# Altium PCB cs301_11.PcbDoc
Units mm, origin at the board's own origin, x right, y up, seen from the top; angles counter-clockwise.
Board outline 274.95 x 168.53 mm, 2 copper layers (Top Layer, Bottom Layer); 112 components, 68 nets, 384 pads, 0 vias.
Unrouted connection lines stored in the file: 31.
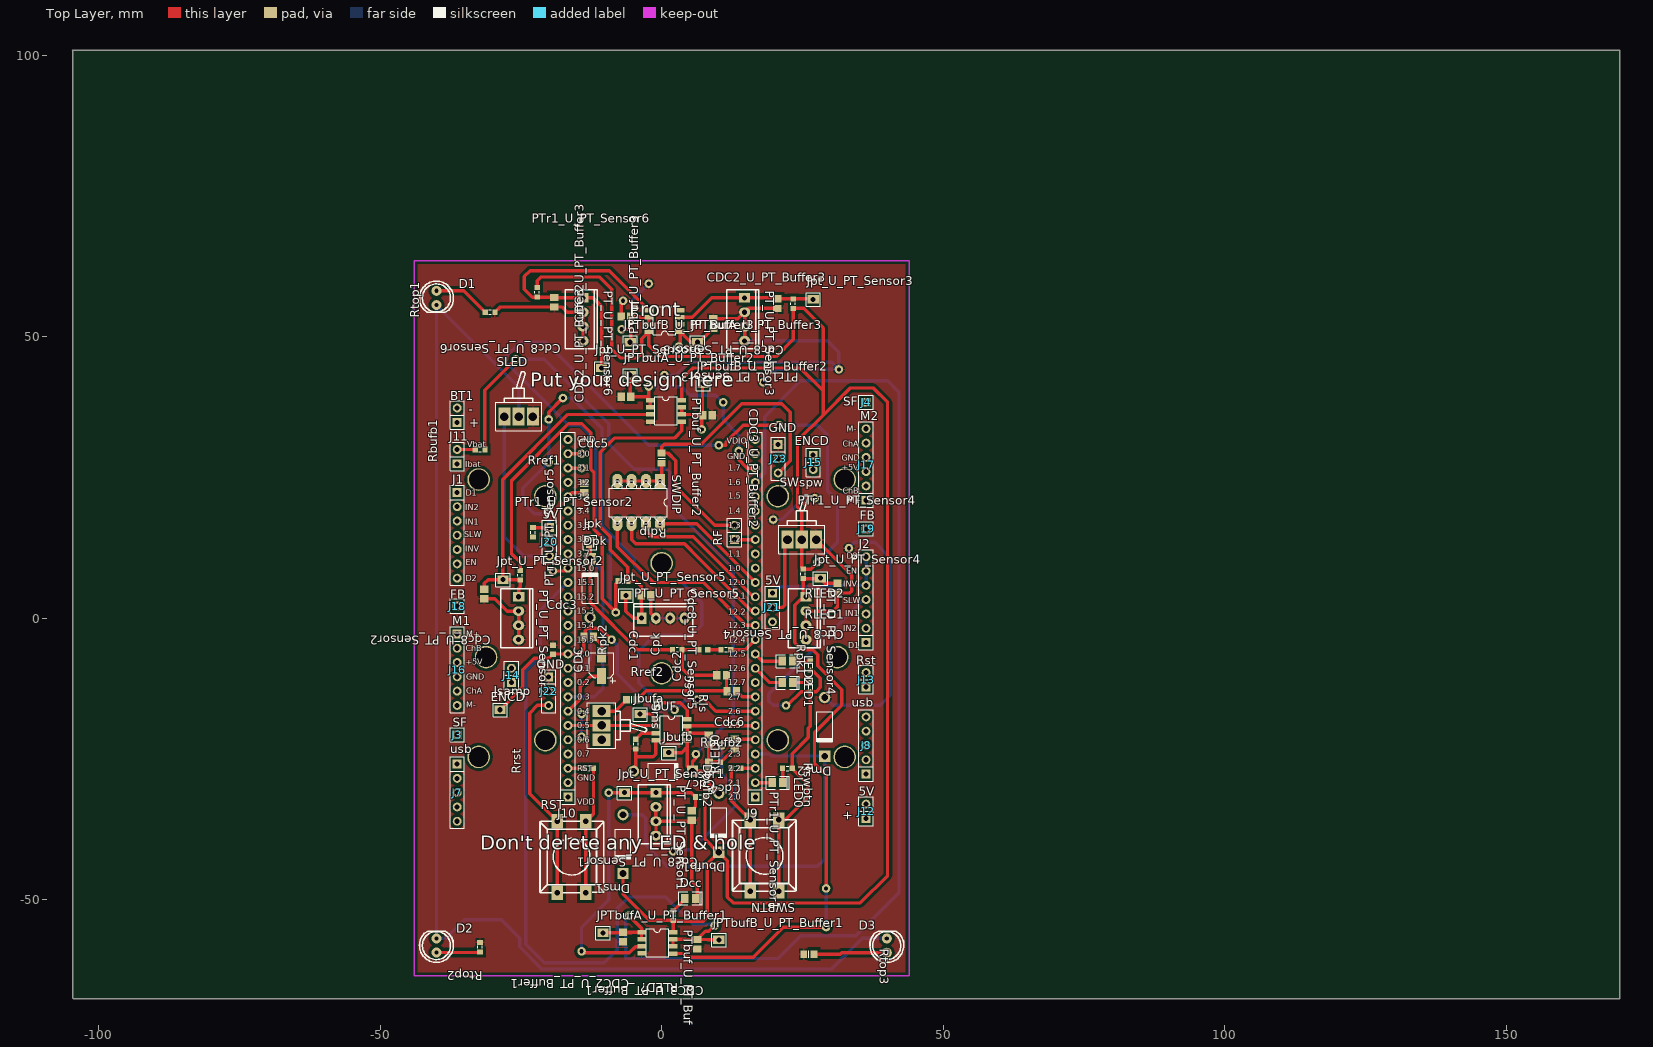
[diagram p0: Top Layer view]
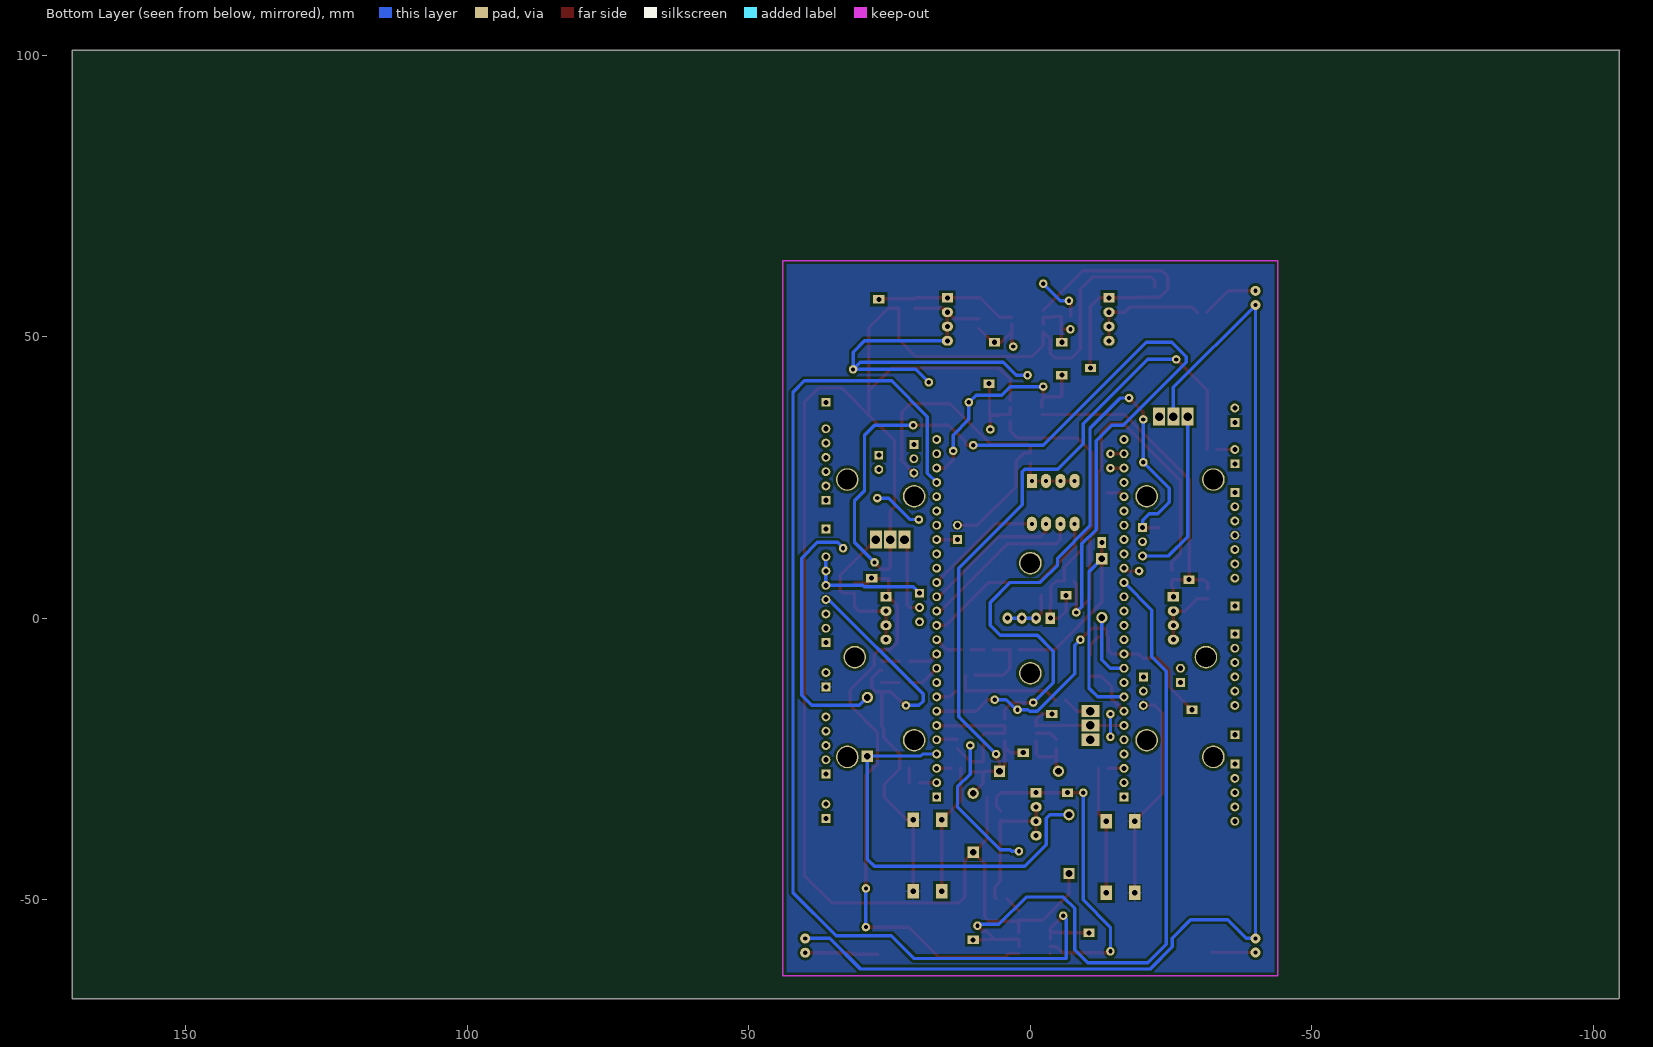
[diagram p1: Bottom Layer view, seen from below]

## Layer stack, top to bottom
Top Solder: solder mask 0.0102, Solder Resist, Dk 3.5
Top Layer: signal copper 0.0356
Dielectric1: dielectric 0.32, FR-4, Dk 4.8
Bottom Layer: signal copper 0.0356
Bottom Solder: solder mask 0.0102, Solder Resist, Dk 3.5

## Board outline
-104.6,-67.48 -104.473,-67.607 170.228,-67.607 170.228,100.922 -104.727,100.922 -104.6,100.795 -104.6,-67.48

## Design rules (kind name [scope] priority, off if disabled: settings)
Clearance [All] p1: gap=0.5
PolygonConnect [All] p1: connectstyle=Relief reliefconductorwidth=0.305 reliefentries=4 polygonreliefangle="90 Angle" airgapwidth=0.254
RoomDefinition U_Vref_2v5 [InComponentClass('U_Vref_2v5')] p1: confinementstyle=ConfineIn formatcopy=TRUE lockcomponents=FALSE outline 146.558,-19.304 186.182,-19.304 186.182,-4.064 146.558,-4.064
RoomDefinition U_Sensors [InComponentClass('U_Sensors')] p2: confinementstyle=ConfineIn formatcopy=TRUE lockcomponents=FALSE outline 1.016,129.54 199.136,129.54 199.136,145.796 1.016,145.796
RoomDefinition U_PT_Sensor6 [InComponentClass('U_PT_Sensor6')] p3: confinementstyle=ConfineIn formatcopy=TRUE lockcomponents=FALSE outline 173.482,157.988 246.888,157.988 246.888,176.53 173.482,176.53
RoomDefinition U_PT_Sensor5 [InComponentClass('U_PT_Sensor5')] p4: confinementstyle=ConfineIn formatcopy=TRUE lockcomponents=FALSE outline 172.212,89.916 354.838,89.916 354.838,108.458 172.212,108.458
RoomDefinition U_PT_Sensor4 [InComponentClass('U_PT_Sensor4')] p5: confinementstyle=ConfineIn formatcopy=TRUE lockcomponents=FALSE outline 169.672,73.406 351.996,73.406 351.996,91.948 169.672,91.948
RoomDefinition U_PT_Sensor3 [InComponentClass('U_PT_Sensor3')] p6: confinementstyle=ConfineIn formatcopy=TRUE lockcomponents=FALSE outline 171.958,56.642 354.584,56.642 354.584,75.184 171.958,75.184
RoomDefinition U_PT_Sensor2 [InComponentClass('U_PT_Sensor2')] p7: confinementstyle=ConfineIn formatcopy=TRUE lockcomponents=FALSE outline 169.672,39.878 352.298,39.878 352.298,58.42 169.672,58.42
RoomDefinition U_PT_Sensor1 [InComponentClass('U_PT_Sensor1')] p8: confinementstyle=ConfineIn formatcopy=TRUE lockcomponents=FALSE outline 171.498,21.928 350.568,21.928 350.568,40.47 171.498,40.47
RoomDefinition U_PT_Buffer3 [InComponentClass('U_PT_Buffer3')] p9: confinementstyle=ConfineIn formatcopy=TRUE lockcomponents=FALSE outline 171.498,12.276 313.992,12.276 313.992,23.198 171.498,23.198
RoomDefinition U_PT_Buffer2 [InComponentClass('U_PT_Buffer2')] p10: confinementstyle=ConfineIn formatcopy=TRUE lockcomponents=FALSE outline 171.498,2.624 313.992,2.624 313.992,13.546 171.498,13.546
RoomDefinition U_PT_Buffer1 [InComponentClass('U_PT_Buffer1')] p11: confinementstyle=ConfineIn formatcopy=TRUE lockcomponents=FALSE outline 171.498,-7.028 311.452,-7.028 311.452,3.894 171.498,3.894
RoomDefinition U_Interface [InComponentClass('U_Interface')] p12: confinementstyle=ConfineIn formatcopy=TRUE lockcomponents=FALSE outline 171.244,-53.51 279.702,-53.51 279.702,-35.222 171.244,-35.222
RoomDefinition cs301_11 [InComponentClass('cs301_11')] p13: confinementstyle=ConfineIn formatcopy=TRUE lockcomponents=FALSE outline 171.244,-67.988 205.534,-67.988 205.534,-52.24 171.244,-52.24
RoutingVias [All] p1: holewidth=0.7 width=1.7 viastyle="Through Hole" minholewidth=0.7 minwidth=1.6 maxholewidth=0.7 maxwidth=1.6
SilkToSolderMaskClearance SilkscreenOverComponentPads [IsPad] p1: minsilkscreentomaskgap=0.254 clearancetoexposedcopper=TRUE
SolderMaskExpansion [All] p1: expansion=0.102
UnpouredPolygon [All] p1: allowunpoured=FALSE
Width [All] p1: maxlimit=0.7 minlimit=0.3 preferedwidth=0.6 minimp=50.000000 maximp=50.000000 favimp=50.000000
28 further rules are at their usual default settings.

## Classes and differential pairs
channel class PT_Sensor: U_PT_Sensor1 U_PT_Sensor2 U_PT_Sensor3 U_PT_Sensor4 U_PT_Sensor5 U_PT_Sensor6
channel class PT_Buffer: U_PT_Buffer1 U_PT_Buffer2 U_PT_Buffer3
net class SOB[1..3]: SOB1 SOB2 SOB3
net class SOA[1..3]: SOA1 SOA2 SOA3
net class PTS[1..6]: PTS1 PTS2 PTS3 PTS4 PTS5 PTS6
component class U_Vref_2v5: BUF CDC Jbufa Rref1 Rref2
component class U_Sensors: Cdc1 Cdc2 Cdc3 Cdc4 Cdc5 Cdc6 Cdc7 Cpk Csc Dbufb1 Dbufb2 Dcc Dms1 Dms2 Dpk Jbufb Jpk Jsamp Rbufb1 Rbufb2 RLED? Rls Rpk1 Rpk2 Sms SWspw
component class U_PT_Sensor6: Cdc8_U_PT_Sensor6 Jpt_U_PT_Sensor6 PT_U_PT_Sensor6 PTr1_U_PT_Sensor6
component class U_PT_Sensor5: Cdc8_U_PT_Sensor5 Jpt_U_PT_Sensor5 PT_U_PT_Sensor5 PTr1_U_PT_Sensor5
component class U_PT_Sensor4: Cdc8_U_PT_Sensor4 Jpt_U_PT_Sensor4 PT_U_PT_Sensor4 PTr1_U_PT_Sensor4
component class U_PT_Sensor3: Cdc8_U_PT_Sensor3 Jpt_U_PT_Sensor3 PT_U_PT_Sensor3 PTr1_U_PT_Sensor3
component class U_PT_Sensor2: Cdc8_U_PT_Sensor2 Jpt_U_PT_Sensor2 PT_U_PT_Sensor2 PTr1_U_PT_Sensor2
component class U_PT_Sensor1: Cdc8_U_PT_Sensor1 Jpt_U_PT_Sensor1 PT_U_PT_Sensor1 PTr1_U_PT_Sensor1
component class U_PT_Buffer3: CDC2_U_PT_Buffer3 CDC3_U_PT_Buffer3 JPTbufA_U_PT_Buffer3 JPTbufB_U_PT_Buffer3 PTbuf_U_PT_Buffer3
component class U_PT_Buffer2: CDC2_U_PT_Buffer2 CDC3_U_PT_Buffer2 JPTbufA_U_PT_Buffer2 JPTbufB_U_PT_Buffer2 PTbuf_U_PT_Buffer2
component class U_PT_Buffer1: CDC2_U_PT_Buffer1 CDC3_U_PT_Buffer1 JPTbufA_U_PT_Buffer1 JPTbufB_U_PT_Buffer1 PTbuf_U_PT_Buffer1
component class U_Interface: LED0 LED1 LED2 Rdip RLED0 RLED1 RLED2 Rrst RST Rswbtn SWBTN SWDIP

## Components (designator, comment, footprint, x,y, rotation, side; value= is the part's Value field where it differs from the comment)
BT1 "Battery" SIP2 -36.322,34.798 r90 top locked
BUF "LT6221" ECE-SO8 1.778,-19.812 r0 top
CDC "10uF" ECE-CAPAE4X5.4SM -10.668,-8.382 r90 top
Cdc1 "47nF" ECE-CAPC2012-0805SM -12.954,-3.302 r0 top
Cdc2 "47nF" ECE-CAPC2012-0805SM 10.668,-10.16 r180 top
CDC2_U_PT_Buffer1 "47nF" ECE-CAPC2012-0805SM -6.858,-56.642 r270 top (schematic designator Cdc2)
CDC2_U_PT_Buffer2 "47nF" ECE-CAPC2012-0805SM -6.35,39.37 r180 top (schematic designator Cdc2)
CDC2_U_PT_Buffer3 "47nF" ECE-CAPC2012-0805SM 9.144,52.324 r90 top (schematic designator Cdc2)
Cdc3 "47nF" ECE-CAPC1608-0603SM -19.304,-5.588 r90 top
CDC3_U_PT_Buffer1 "47nF" ECE-CAPC2012-0805SM 6.35,-57.912 r270 top (schematic designator Cdc3)
CDC3_U_PT_Buffer2 "47nF" ECE-CAPC2012-0805SM 8.128,36.068 r0 top (schematic designator Cdc3)
CDC3_U_PT_Buffer3 "47nF" ECE-CAPC2012-0805SM -6.35,53.594 r180 top (schematic designator Cdc3)
Cdc4 "100nF" ECE-CAPC2012-0805SM 12.954,-22.352 r270 top
Cdc5 "100nF" ECE-CAPC2012-0805SM -13.716,23.114 r90 top
Cdc6 "100nF" ECE-CAPC1608-0603SM 10.414,-26.416 r90 top
Cdc7 "100nF" ECE-CAPC2012-0805SM 8.382,-21.59 r270 top
Cdc8_U_PT_Sensor1 "47nF" ECE-CAPC2012-0805SM 5.334,-35.052 r270 top (schematic designator Cdc8)
Cdc8_U_PT_Sensor2 "47nF" ECE-CAPC2012-0805SM -31.496,4.318 r270 top (schematic designator Cdc8)
Cdc8_U_PT_Sensor3 "47nF" ECE-CAPC2012-0805SM 20.574,55.88 r270 top (schematic designator Cdc8)
Cdc8_U_PT_Sensor4 "47nF" ECE-CAPC2012-0805SM 31.242,5.334 r270 top (schematic designator Cdc8)
Cdc8_U_PT_Sensor5 "47nF" ECE-CAPC2012-0805SM -2.794,4.064 r0 top (schematic designator Cdc8)
Cdc8_U_PT_Sensor6 "47nF" ECE-CAPC2012-0805SM -19.05,56.134 r270 top (schematic designator Cdc8)
Cpk "1uF" ECE-CAPC1608-0603SM 7.366,-5.588 r180 top
Csc "1uF" ECE-CAPC2012-0805SM 12.446,-12.954 r180 top
D1 "LED" LED0.1/5MM#1 -40,55.62 r180 top locked
D2 "LED" LED0.1/5MM#2 -40,-56.88 r0 top locked
D3 "LED" LED0.1/5MM#1 40,-56.88 r0 top locked
Dbufb1 "1N4148" ECE-DIO10.46-5.3x2.8TH 10.16,-36.322 r270 top
Dbufb2 "1N4148" ECE-DIO10.46-5.3x2.8TH 0.254,-27.178 r0 top
Dcc "LTST-C170KAKT" ECE-LED2012-0805SM 5.08,-49.784 r0 top
Dms1 "1N4148" ECE-DIO10.46-5.3x2.8TH -6.858,-40.132 r270 top
Dms2 "1N4148" ECE-DIO10.46-5.3x2.8TH 28.956,-19.304 r270 top
Dpk "1N4148" ECE-DIO10.46-5.3x2.8TH -12.7,5.334 r90 top
J1 "CON7" SIP7 -36.322,22.352 r270 top locked
J2 "CON7" SIP7 36.322,-4.318 r90 top locked
J3 "SF" SIP1/0.6 -36.322,-20.701 r270 top locked
J4 "SF" SIP1/0.6 36.322,38.354 r180 top locked
J7 "usb" SIP5 -36.322,-25.908 r270 top locked
J8 "usb" SIP5 36.322,-27.686 r90 top locked
J9 "26PIN" SIP26 16.637,-31.75 r90 top locked
J10 "26PIN" SIP26 -16.637,-31.75 r90 top locked
J11 "Battery" sip2 -36.322,27.432 r90 top locked
J12 "5V" sip2 36.322,-35.56 r90 top locked
J13 "Rst" sip2 36.322,-12.192 r90 top locked
J14 "ENCD" sip2 -26.67,-11.43 r90 top locked
J15 "ENCD" sip2 26.924,28.956 r270 top locked
J16 "M1" sip6 -36.322,-2.794 r270 top locked
J17 "M2" sip6 36.322,20.955 r90 top locked
J18 "FB" SIP1/0.6 -36.322,2.159 r0 top locked
J19 "FB" SIP1/0.6 36.322,15.875 r0 top locked
J20 "5V" sip3 -19.939,16.129 r270 top locked
J21 "5V" sip3 19.685,4.445 r270 top locked
J22 "GND" sip3 -20.066,-10.414 r270 top locked
J23 "GND" sip3 20.701,30.861 r270 top locked
Jbufa "TEST PIN" ECE-HDR1TH -3.81,-17.018 r90 top
Jbufb "TEST PIN" ECE-HDR1TH 1.27,-23.876 r90 top
Jpk "TEST PIN" ECE-HDR1TH -12.7,13.462 r0 top
Jpt_U_PT_Sensor1 "TEST PIN" ECE-HDR1TH -6.604,-30.988 r90 top (schematic designator Jpt)
Jpt_U_PT_Sensor2 "TEST PIN" ECE-HDR1TH -28.194,6.858 r90 top (schematic designator Jpt)
Jpt_U_PT_Sensor3 "TEST PIN" ECE-HDR1TH 26.924,56.642 r90 top (schematic designator Jpt)
Jpt_U_PT_Sensor4 "TEST PIN" ECE-HDR1TH 28.194,7.112 r90 top (schematic designator Jpt)
Jpt_U_PT_Sensor5 "TEST PIN" ECE-HDR1TH -6.35,4.064 r90 top (schematic designator Jpt)
Jpt_U_PT_Sensor6 "TEST PIN" ECE-HDR1TH -10.668,44.45 r90 top (schematic designator Jpt)
JPTbufA_U_PT_Buffer1 "TEST PIN" ECE-HDR1TH -10.414,-55.88 r90 top (schematic designator JPTbufA)
JPTbufA_U_PT_Buffer2 "TEST PIN" ECE-HDR1TH -5.588,43.18 r90 top (schematic designator JPTbufA)
JPTbufA_U_PT_Buffer3 "TEST PIN" ECE-HDR1TH 6.35,49.022 r90 top (schematic designator JPTbufA)
JPTbufB_U_PT_Buffer1 "TEST PIN" ECE-HDR1TH 10.16,-57.15 r90 top (schematic designator JPTbufB)
JPTbufB_U_PT_Buffer2 "TEST PIN" ECE-HDR1TH 7.366,41.656 r90 top (schematic designator JPTbufB)
JPTbufB_U_PT_Buffer3 "TEST PIN" ECE-HDR1TH -5.588,49.022 r90 top (schematic designator JPTbufB)
Jsamp "TEST PIN" ECE-HDR1TH -28.702,-16.256 r90 top
LED0 "LTST-C170KGKT" ECE-LED2012-0805SM 20.574,-29.21 r0 top
LED1 "LTST-C170KAKT" ECE-LED2012-0805SM 22.352,-11.43 r0 top
LED2 "LTST-C170KAKT" ECE-LED2012-0805SM 22.352,-7.62 r0 top
PT_U_PT_Sensor1 "4 Way" ECE-600104STTH -1.016,-30.988 r0 top (schematic designator PT)
PT_U_PT_Sensor2 "4 Way" ECE-600104STTH -25.4,3.81 r0 top (schematic designator PT)
PT_U_PT_Sensor3 "4 Way" ECE-600104STTH 14.732,56.896 r0 top (schematic designator PT)
PT_U_PT_Sensor4 "4 Way" ECE-600104STTH 25.654,3.81 r0 top (schematic designator PT)
PT_U_PT_Sensor5 "4 Way" ECE-600104STTH -3.556,0 r90 top (schematic designator PT)
PT_U_PT_Sensor6 "4 Way" ECE-600104STTH -13.97,56.896 r0 top (schematic designator PT)
PTbuf_U_PT_Buffer1 "LT6221" ECE-SO8 -0.762,-57.658 r0 top (schematic designator PTbuf)
PTbuf_U_PT_Buffer2 "LT6221" ECE-SO8 0.762,36.83 r0 top (schematic designator PTbuf)
PTbuf_U_PT_Buffer3 "LT6221" ECE-SO8 0.508,52.832 r180 top (schematic designator PTbuf)
PTr1_U_PT_Sensor1 "39K" ECE-RESC1608-0603SM 6.858,-31.75 r0 top (schematic designator PTr1)
PTr1_U_PT_Sensor2 "39K" ECE-RESC1608-0603SM -25.146,7.62 r90 top (schematic designator PTr1)
PTr1_U_PT_Sensor3 "39K" ECE-RESC1608-0603SM 23.368,55.88 r270 top (schematic designator PTr1)
PTr1_U_PT_Sensor4 "39K" ECE-RESC1608-0603SM 25.146,7.874 r90 top (schematic designator PTr1)
PTr1_U_PT_Sensor5 "39K" ECE-RESC1608-0603SM -6.858,6.604 r180 top (schematic designator PTr1)
PTr1_U_PT_Sensor6 "39K" ECE-RESC1608-0603SM -22.098,57.912 r90 top (schematic designator PTr1)
Rbufb1 "47K" ECE-RESC1608-0603SM -32.258,29.972 r180 top
Rbufb2 "56K" ECE-RESC2012-0805SM 8.382,-26.416 r270 top
Rdip "1K" ECE-RESC2012-0805SM 0,28.448 r270 top
RF "" sip2 12.954,13.97 r90 top
RLED0 "270R" ECE-RESC1608-0603SM 22.352,-26.67 r180 top
RLED1 "270R" ECE-RESC1608-0603SM 26.416,-12.192 r90 top
RLED2 "270R" ECE-RESC1608-0603SM 26.416,-8.382 r90 top
RLED? "270R" ECE-RESC1608-0603SM 2.032,-52.832 r270 top
Rls "4K7" ECE-RESC2012-0805SM -5.334,-14.478 r0 top
Rpk1 "220R" ECE-RESC1608-0603SM 11.43,-5.588 r0 top
Rpk2 "220K" ECE-RESC1608-0603SM 2.794,-5.588 r180 top
Rref1 "47K" ECE-RESC1608-0603SM -22.86,15.24 r90 top
Rref2 "47K" ECE-RESC1608-0603SM -4.572,-22.352 r90 top
Rrst "1K" ECE-RESC1608-0603SM -12.954,-26.67 r180 top
RST "SW-PB" SW-PB -19.05,-46.228 r90 top
Rswbtn "1K" ECE-RESC1608-0603SM 13.208,-26.67 r0 top
Rtop1 "270R" ECE-RESC1608-0603SM -30.48,54.356 r180 top
Rtop2 "270R" ECE-RESC1608-0603SM -32.258,-58.42 r270 top
Rtop3 "270R" ECE-RESC2012-0805SM 26.162,-59.69 r0 top
SLED "SW-SPDT" SW-SPDT -27.94,35.814 r0 top
Sms "SW-SPDT" SW-SPDT -10.668,-16.51 r270 top
SWBTN "SW-PB" SW-PB 21.336,-38.354 r270 top
SWDIP "*" ECE-DIP8 -0.254,24.384 r270 top
SWspw "SW-SPDT" SW-SPDT 22.352,13.97 r0 top

## Footprints (in the part's own frame and the unit in brackets; to place one, negate y for a bottom-side part, rotate by r counter-clockwise, add the part's x,y. Pads: shape width x height; smd on the part's side, far side on the other; paste and mask are expansions set on the pad)
ECE-600104STTH [mm] "Polarised Header 4 way"
  rect 2x1.7 hole 0.9: 1(0,0)
  oval 2x1.7 hole 0.9: 2(0,-2.54) 3(0,-5.08) 4(0,-7.62)
  silkscreen extent -3.16,-9.04 2.54,1.42
ECE-CAPAE4X5.4SM [mm] "Capacitor, polarized, aluminum can; 4x5.4mm DxH"
  rect 2.8x1.6 smd: 1(-1.9,0) 2(1.9,0)
  silkscreen extent -3.2,-2.5 2.29,2.16
ECE-CAPC1608-0603SM [mm] "Chip Capacitor, Body 1.6x0.8mm, IPC Medium Density"
  rect 1x1 smd: 1(-0.8,0) 2(0.8,0)
  body extent -0.87,-0.48 0.87,0.48, height 0.85
ECE-CAPC2012-0805SM [mm] "Chip Capacitor, Body 2.0x1.3mm, IPC Medium Density"
  rect 1.3x1.5 smd: 1(-0.85,0) 2(0.85,0)
  body extent -1,-0.6 1,0.6, height 0.5
ECE-DIO10.46-5.3x2.8TH [mm] "Diode, Axial; Body 5.2 x 2.7 mm (LxDia. max), Lead Dia. 0.86 mm (max)"
  round 2 hole 1.2: 1(-5.23,0)
  rect 2x2 hole 1.2: 2(5.23,0)
  silkscreen extent -2.65,-1.4 2.75,1.4
ECE-DIP8 [mil]
  rect 100x70 hole 28: 1(0,0)
  oval 100x70 hole 28: 2(0,-100) 3(0,-200) 4(0,-300) 5(300,-300) 6(300,-200) 7(300,-100) 8(300,0)
  silkscreen extent 0,-357 300,50
ECE-HDR1TH [mm] "Test Pin"
  rect 1.5x2 hole 0.9: 1(0,0)
  silkscreen extent -1.25,-1.29 1.15,1.25
ECE-LED2012-0805SM [mm] "RED AS AlGaAs SMD LED, Body; 2mm x 1.25 mm (LxW)"
  rect 1.3x1.6 smd: 1(-0.95,0) 2(0.95,0)
  silkscreen extent -2,-1.15 2.13,1.15
ECE-RESC1608-0603SM [mm] "Chip Resistor, Body 1.6x0.8mm, IPC Medium Density"
  rect 0.9x1 smd: 1(-0.85,0) 2(0.85,0)
  silkscreen extent -0.2,-0.4 0.2,0.4, body extent -0.85,-0.48 0.85,0.48, height 0.6
ECE-RESC2012-0805SM [mm] "Chip Resistor, Body 2.0x1.3mm, IPC Medium Density"
  rect 1.2x1.4 smd: 1(-0.9,0) 2(0.9,0)
  silkscreen extent 0,-0.6 0,0.6, body extent -0.9,-0.62 1.1,0.62, height 0.4
ECE-SO8 [mm] "8-Lead Plastic Small Outline, 1.27mm pitch"
  rect 1.5x0.8 smd: 1(-2.8,1.905) 2(-2.8,0.635) 3(-2.8,-0.635) 4(-2.8,-1.9) 5(2.8,-1.905) 6(2.8,-0.635) 7(2.8,0.635) 8(2.8,1.905)
  silkscreen extent -2,-2.5 2,2.5, body extent -3,-2.45 3,2.45, height 1.7
LED0.1/5MM#1 [mil]
  round 70 hole 30: A(0,0) K(0,-100)
  silkscreen extent -118,-168 118,50
LED0.1/5MM#2 [mil]
  round 70 hole 30: A(0,0) K(0,-98.42)
  silkscreen extent -118,-168 118,50
SIP1/0.6 [mil]
  rect 62x62 hole 35.43: 1(0,0)
  silkscreen extent -50,-50 50,50
SIP2 [mil]
  rect 62x62 hole 35.43: 1(0,0)
  round 62 hole 35.43: 2(100,0)
  silkscreen extent -50,-50 150,50
sip2 [mil]
  rect 62x62 hole 35.43: 1(0,0)
  round 62 hole 35.43: 2(100,0)
  silkscreen extent -50,-50 150,50
sip3 [mil]
  rect 62x62 hole 35.43: 1(0,0)
  round 62 hole 35.43: 2(100,0) 3(200,0)
  silkscreen extent -50,-50 250,50
SIP5 [mil]
  rect 62x62 hole 35.43: 1(0,0)
  round 62 hole 35.43: 2(100,0) 3(200,0) 4(300,0) 5(400,0)
  silkscreen extent -50,-50 450,50
sip6 [mil]
  rect 62x62 hole 35.43: 1(0,0)
  round 62 hole 35.43: 2(100,0) 3(200,0) 4(300,0) 5(400,0) 6(500,0)
  silkscreen extent -50,-50 550,50
SIP7 [mil]
  rect 62x62 hole 35.43: 1(0,0)
  round 62 hole 35.43: 2(100,0) 3(200,0) 4(300,0) 5(400,0) 6(500,0) 7(600,0)
  silkscreen extent -50,-50 650,50
SIP26 [mil]
  rect 62x62 hole 35.43: 1(0,0)
  round 62 hole 35.43: 2(100,0) 3(200,0) 4(300,0) 5(400,0) 6(500,0) 7(600,0) 8(700,0) 9(800,0) 10(900,0) 11(1000,0) 12(1100,0) 13(1200,0) 14(1300,0) 15(1400,0) 16(1500,0) 17(1600,0) 18(1700,0) 19(1800,0) 20(1900,0) 21(2000,0) 22(2100,0) 23(2200,0) 24(2300,0) 25(2400,0) 26(2500,0)
  silkscreen extent -50,-50 2550,50
SW-PB [mil]
  rect 100x80 hole 40: 1(-100,-20) 1(400,-20) 2(-100,-220) 2(400,-220)
  silkscreen extent -100,-345 400,100
SW-SPDT [mil]
  rect 85x125 hole 60: 1(0,0) 2(100,0) 3(200,0)
  silkscreen extent -60,-100 260,315

## Part data
BT1 J11 J12 J13 J14 J15 RF: library part CON2, "Connector"
BUF PTbuf_U_PT_Buffer1 PTbuf_U_PT_Buffer2 PTbuf_U_PT_Buffer3: library part OPA000102, "IC OPAMP LT6221 DUAL SM"
CDC: library part CAP000303, "CAP 10uF 16V ELE SM"
Cdc1 Cdc2 CDC2_U_PT_Buffer1 CDC2_U_PT_Buffer2 CDC2_U_PT_Buffer3 CDC3_U_PT_Buffer1 CDC3_U_PT_Buffer2 CDC3_U_PT_Buffer3 Cdc8_U_PT_Sensor1 Cdc8_U_PT_Sensor2 Cdc8_U_PT_Sensor3 Cdc8_U_PT_Sensor4 Cdc8_U_PT_Sensor5 Cdc8_U_PT_Sensor6: library part CAP000522, "CAP CER 47nF 50V X7R SM0805"
Cdc3: library part CAP000622, "CAP CER 47nF 50V X7R SM0603"
Cdc4 Cdc5 Cdc7: library part CAP000524, "CAP CER 100nF 50V X7R SM0805"
Cdc6: library part CAP000624, "CAP CER 100nF 25V X7R SM0603"
Cpk: library part CAP000630, "CAP CER 1uF 50V X7R SM0603"
Csc: library part CAP000530, "CAP CER 1uF 50V X7R SM0805"
Dbufb1 Dbufb2 Dms1 Dms2 Dpk: library part DIO000005, "Small Signal Diode 2A 100V TH"
Dcc LED1 LED2: library part DIO000105, "LED RED ORANGE CLEAR 0805 SMD"
J1 J2: "Connector"
J3 J4 J18 J19: library part CON1, "Connector"
J7 J8: library part CON5, "Connector"
J16 J17: library part CON6, "Connector"
J20 J21 J22 J23: library part CON3, "Connector"
Jbufa Jbufb Jpk Jpt_U_PT_Sensor1 Jpt_U_PT_Sensor2 Jpt_U_PT_Sensor3 Jpt_U_PT_Sensor4 Jpt_U_PT_Sensor5 Jpt_U_PT_Sensor6 JPTbufA_U_PT_Buffer1 JPTbufA_U_PT_Buffer2 JPTbufA_U_PT_Buffer3 JPTbufB_U_PT_Buffer1 JPTbufB_U_PT_Buffer2 JPTbufB_U_PT_Buffer3 Jsamp: library part CON000017
LED0: library part DIO000104, "LED GREEN CLEAR 0805 SM"
PT_U_PT_Sensor1 PT_U_PT_Sensor2 PT_U_PT_Sensor3 PT_U_PT_Sensor4 PT_U_PT_Sensor5 PT_U_PT_Sensor6: library part CON000003, "HEADER POLARISED 4WAY TH"
PTr1_U_PT_Sensor1 PTr1_U_PT_Sensor2 PTr1_U_PT_Sensor3 PTr1_U_PT_Sensor4 PTr1_U_PT_Sensor5 PTr1_U_PT_Sensor6: library part RES000157, "RES CER 39K 1608 SM"
Rbufb1 Rref1 Rref2: library part RES000158, "RES CER 47K 1608 SM"
Rbufb2: library part RES000559, "RES CER 56K 2012 SM"
Rdip: library part RES000538, "RES CER 1K 2012 SM"
RLED0 RLED1 RLED2 RLED? Rtop1 Rtop2: library part RES000131, "RES CER 270R 1608 SM"
Rls: library part RES000546, "RES CER 4K7 2012 SM"
Rpk1: library part RES000130, "RES CER 220R 1608 SM"
Rpk2: library part RES000166, "RES CER 220K 1608 SM"
Rrst Rswbtn: library part RES000138, "RES CER 1K 1608 SM"
RST SWBTN: "Push Button Switch"
Rtop3: library part RES000531, "RES CER 270R 2012 SM"
SLED Sms SWspw: "Toggle Switch"
SWDIP: library part Switch-DIP8

## Free pads (board coordinates)
  round 4 hole 3.5 unplated: 0(-32.512,-24.638) 0(-32.512,24.638) 0(-31.191,-6.909) 0(0,-9.779) 0(0,9.779) 0(31.191,-6.909) 0(32.512,-24.638) 0(32.512,24.638) 1(-20.65,-21.666) 1(-20.65,21.666) 1(20.65,-21.666) 1(20.65,21.666)
  round 1.524 hole 0.762: 2(-25.908,45.974) 3(-25.908,45.974) 3(-8.128,1.016) 3(27.686,9.906) 4(-9.398,-30.988) 4(29.21,-54.864) 4(29.21,-48.006) 5(-14.224,-59.182) 5(6.096,-24.13) 6(-20.066,27.686) 6(-20.066,35.306) 6(-17.526,39.116) 6(-0.508,-14.986) 6(6.096,-24.13) 7(22.098,-15.494) 11(0.508,43.18) 12(31.496,44.196) 13(-6.858,56.388) 14(-2.286,59.436) 16(6.35,-14.478) 17(2.286,-16.256) 18(-8.89,-3.81) 19(10.16,30.734) 20(20.828,34.29) 21(13.716,29.718) 22(10.922,38.354) 23(-2.286,41.148) 24(-5.842,-52.832) 25(-14.224,29.21) 26(-14.224,26.67) 29(-19.304,8.382) 35(3.048,48.26) 36(9.398,-54.61) 37(7.112,33.528) 38(-7.112,51.308) 39(18.034,41.91) 40(19.812,17.526) 41(27.178,21.336) 42(33.274,12.446) 43(10.668,-22.606) 44(2.032,-41.402) 45(-14.224,-21.082) 46(-14.224,-17.018)

## Nets (pads, with @x,y where several pads share a name; then routed paths per layer and width w, separated by ;. In a path a pad name is that pad's centre, name@x,y a point inside that pad or via, vN(x,y) a via of type N, cw(c..) or ccw(c..) an arc to the next point about the centre after c; other vN are vias at no path point)
AGND: BUF.4 Cdc1.2 Cdc2.2 CDC2_U_PT_Buffer1.2 CDC2_U_PT_Buffer2.2 CDC2_U_PT_Buffer3.2 Cdc3.2 CDC3_U_PT_Buffer1.2 CDC3_U_PT_Buffer2.2 CDC3_U_PT_Buffer3.2 Cdc4.2 Cdc5.2 Cdc6.2 Cdc7.2 Cdc8_U_PT_Sensor1.2 Cdc8_U_PT_Sensor2.2 Cdc8_U_PT_Sensor3.2 Cdc8_U_PT_Sensor4.2 Cdc8_U_PT_Sensor5.2 Cdc8_U_PT_Sensor6.2 CDC.2 Cpk.2 Dbufb2.1 Dcc.2 Dms2.1 J22.1 J23.1 pad.11 pad.12 pad.13 pad.14 pad.39 pad.40 pad.41 pad.42 pad.43 pad.44 pad.45 pad.46 PT_U_PT_Sensor1.2 PT_U_PT_Sensor1.3 PT_U_PT_Sensor1.4 PT_U_PT_Sensor2.2 PT_U_PT_Sensor2.3 PT_U_PT_Sensor2.4 PT_U_PT_Sensor3.2 PT_U_PT_Sensor3.3 PT_U_PT_Sensor3.4 PT_U_PT_Sensor4.2 PT_U_PT_Sensor4.3 PT_U_PT_Sensor4.4 PT_U_PT_Sensor5.2 PT_U_PT_Sensor5.3 PT_U_PT_Sensor5.4 PT_U_PT_Sensor6.2 PT_U_PT_Sensor6.3 PT_U_PT_Sensor6.4 PTbuf_U_PT_Buffer1.4 PTbuf_U_PT_Buffer2.4 PTbuf_U_PT_Buffer3.4 Rbufb2.1 Rpk2.1 Rref2.1 Rtop1.1 Rtop2.1 Rtop3.1 SLED.3 SWspw.3 | length 311.8
  Top Layer w0.6: Cdc8_U_PT_Sensor2.2 -29.633,3.468 -27.435,1.27 PT_U_PT_Sensor2.2@-25.403,1.27 ; Rtop1.1@-29.63,54.288 Rtop1.1 -28.702,55.284 Cdc8_U_PT_Sensor6.2 -17.692,55.284 -16.764,54.356 PT_U_PT_Sensor6.2@-13.973,54.356 ; PT_U_PT_Sensor2.4 -25.403,-3.81 PT_U_PT_Sensor2.3@-25.403,-1.27 ; PT_U_PT_Sensor2.3 PT_U_PT_Sensor2.3@-25.403,-1.27 ; PT_U_PT_Sensor2.2 PT_U_PT_Sensor2.2@-25.403,1.27 ; PT_U_PT_Sensor6.4 -13.973,49.276 PT_U_PT_Sensor6.3@-13.973,51.816 ; PT_U_PT_Sensor6.3 PT_U_PT_Sensor6.3@-13.973,51.816 ; PT_U_PT_Sensor6.2 PT_U_PT_Sensor6.2@-13.973,54.356 ; Cdc1.2 -10.668,-4.738 CDC.2 ; CDC3_U_PT_Buffer3.2 -7.2,56.046 pad.13 ; Dbufb2.1 -4.572,-26.774 -4.572,-24.638 ; Rref2.1 -4.572,-24.638 ; PTbuf_U_PT_Buffer1.4@-3.584,-59.559 PTbuf_U_PT_Buffer1.4 ; Cdc8_U_PT_Sensor5.2 -1.906,4.026 -1.906,0.89 PT_U_PT_Sensor5.2 ; BUF.4 -1.022,-24.136 -1.524,-24.638 -4.572,-24.638 ; PT_U_PT_Sensor1.4 -0.993,-38.608 PT_U_PT_Sensor1.3@-0.993,-36.068 ; PT_U_PT_Sensor1.2 -1.019,-33.528 -1.019,-36.068 PT_U_PT_Sensor1.3 PT_U_PT_Sensor1.3@-0.993,-36.068 ; Dcc.2 6.35,-49.464 6.35,-47.752 5.334,-46.736 Cdc8_U_PT_Sensor1.2 5.168,-36.068 PT_U_PT_Sensor1.3@-0.993,-36.068 ; Cpk.2 Rpk2.1 3.644,-8.978 4.826,-10.16 Cdc2.2 ; Cdc7.2 Rbufb2.1 10.314,-25.516 Cdc6.2 10.54,-25.616 Cdc4.2 ; CDC2_U_PT_Buffer3.2 13.55,53.174 PT_U_PT_Sensor3.2 ; PT_U_PT_Sensor3.4 PT_U_PT_Sensor3.3 PT_U_PT_Sensor3.2 ; Cdc8_U_PT_Sensor3.2 15.406,55.03 PT_U_PT_Sensor3.2 ; PT_U_PT_Sensor4.4 PT_U_PT_Sensor4.3 PT_U_PT_Sensor4.2 30.48,1.27 31.242,2.032 Cdc8_U_PT_Sensor4.2 33.44,4.484 33.782,4.826 33.782,7.62 SWspw.3 ; PT_U_PT_Sensor2.3@-25.403,-1.27 PT_U_PT_Sensor2.2@-25.403,1.27 ; PT_U_PT_Sensor6.3@-13.973,51.816 PT_U_PT_Sensor6.2@-13.973,54.356
  Bottom Layer w0.6: pad.45 pad.46 ; pad.13 -5.334,56.388 pad.14 ; PT_U_PT_Sensor5.2 -1.016,-0.018 4.064,-0.018 PT_U_PT_Sensor5.4 ; pad.11 2.54,43.18 4.826,45.466 30.226,45.466 pad.12 ; pad.44 3.302,-41.402 3.556,-41.148 5.334,-41.148 12.954,-33.528 12.954,-29.972 10.668,-27.686 pad.43 ; PT_U_PT_Sensor3.4 29.464,49.276 31.496,47.244 pad.12 ; pad.39 20.32,44.196 pad.12 ; pad.40 21.336,17.526 25.146,21.336 pad.41 ; Dms2.1 30.376,-15.494 38.862,-15.494 40.64,-13.716 40.64,10.668 37.846,13.462 34.227,13.462 pad.42@33.274,12.509
D11: J1.1 J10.20
D21: J2.1 J10.21
DGND: J1.4 J2.4 J13.1 J22.3 J23.3 pad.7 Rdip.1 RF.2 RLED0.1 RLED1.1 RLED2.1 RST.1 SWBTN.1 | length 179.3
  Top Layer w0.6: J22.3 -22.098,-15.494 -23.45,-16.846 -23.45,-31.16 -18.542,-36.068 RST.1@-18.542,-48.768 ; RF.2 9.398,16.51 2.54,23.368 2.54,27.94 1.132,29.348 Rdip.1 0,30.48 0.424,30.904 7.028,30.904 14.224,38.1 21.336,38.1 22.86,36.576 22.86,27.94 J23.3 ; SWBTN.1@20.828,-48.514 20.828,-35.814 21.932,-35.814 25.952,-31.794 25.952,-29.508 23.202,-26.758 RLED0.1 23.202,-24.042 26.056,-21.188 26.056,-19.526 26.416,-19.166 RLED1.1 ; pad.7 22.352,-15.494 24.804,-13.042 RLED1.1 ; RLED2.1 26.758,-9.232 28.194,-10.668 28.194,-12.29 27.442,-13.042 RLED1.1
  Bottom Layer w0.6: pad.7 19.812,-15.494 19.05,-14.732 19.05,-13.462 35.814,3.302 J2.4
IAMPIN: Cdc5.1 J10.22 J11.1 | length 3.2
  Top Layer w0.6: J10.22 -15.963,22.264 Cdc5.1
IAMPOUT: Cdc4.1 J9.5 J10.18 | length 3.7
  Top Layer w0.6: Cdc4.1 16.549,-21.502 J9.5
IN11: J1.3 J10.14
IN12: J1.2 J10.15
IN21: J2.3 J10.12
IN22: J2.2 J10.13
LED0: J9.2 LED0.1 | length 3
  Top Layer w0.6: J9.2 LED0.1
LED1: J9.10 LED1.1 | length 5.8
  Top Layer w0.6: J9.10 19.177,-11.43 LED1.1
LED2: J9.11 LED2.1 | length 5.3
  Top Layer w0.6: J9.11 17.907,-7.62 LED2.1
NetBUF_3: BUF.3 Rref1.1 Rref2.2 | length 4
  Top Layer w0.6: Rref2.2 -3.517,-20.447 BUF.3
NetBUF_5: BUF.5 Cdc6.1 Dbufb1.1 Dbufb2.2 Jbufb.1 pad.2 pad.3@-25.908,45.974 pad.5@6.096,-24.13 pad.6@6.096,-24.13 Rbufb1.1 Rbufb2.2 | length 135.7
  Top Layer w0.6: Rbufb1.1 -31.408,40.474 pad.2 ; Jbufb.1 3.562,-23.876 4.578,-22.86 ; BUF.5 4.578,-22.86 ; pad.5@6.096,-24.384 6.096,-24.892 5.484,-25.504 Dbufb2.2 ; Dbufb1.1 8.382,-29.314 Rbufb2.2 ; Cdc6.1 10.314,-27.316 Rbufb2.2 ; 4.578,-22.86 4.578,-26.272 Dbufb2.2 ; Dbufb2.2 8.244,-27.178 Rbufb2.2
  Bottom Layer w0.6: pad.2 -20.828,45.974 -9.398,34.544 -9.398,30.988 -4.864,26.454 0.966,26.454 1.435,25.985 1.435,20.155 12.7,8.89 12.7,-17.526 pad.5@6.096,-24.13
NetD1_A: D1.A D2.A D3.A SLED.2 | length 226.5
  Bottom Layer w0.6: SLED.2 -25.4,41.02 D1.A D2.A -38.338,-56.88 -35.052,-53.594 -28.448,-53.594 -25.23,-56.812 -25.23,-58.368 -21.284,-62.314 30.174,-62.314 35.608,-56.88 D3.A
NetD1_K: D1.K Rtop1.2 | length 10.2
  Top Layer w0.6: D1.K -35.134,58.16 Rtop1.2
NetD2_K: D2.K Rtop2.2 | length 7.8
  Top Layer w0.6: D2.K -32.368,-59.38 Rtop2.2
NetD3_K: D3.K Rtop3.2 | length 13
  Top Layer w0.6: Rtop3.2 31.75,-59.69 32.02,-59.42 D3.K
NetDcc_1: Dcc.1 RLED?.1 | length 3.1
  Top Layer w0.6: RLED?.1 4.13,-49.884 Dcc.1
NetLED0_2: LED0.2 RLED0.2 | length 2.5
  Top Layer w0.6: RLED0.2 21.524,-26.692 LED0.2
NetLED1_2: LED1.2 RLED1.2 | length 3.2
  Top Layer w0.6: LED1.2 26.328,-11.43 RLED1.2
NetLED2_2: LED2.2 RLED2.2 | length 3.2
  Top Layer w0.6: LED2.2 26.328,-7.62 RLED2.2
NetRdip_2: Rdip.2 SWDIP.1 SWDIP.2 SWDIP.3 SWDIP.4 | length 10.9
  Top Layer w0.6: SWDIP.4 SWDIP.3 SWDIP.2 SWDIP.1 0,24.638 Rdip.2
NetRls_1: Rls.1 Sms.1 | length 5.9
  Top Layer w0.6: Sms.1@-10.668,-15.864 Sms.1 -8.266,-16.51 Rls.1
NetRrst_1: Rrst.1 RST.2 | length 22.7
  Top Layer w0.6: RST.2@-13.462,-48.768 -13.462,-36.068 -12.104,-34.71 Rrst.1
NetRswbtn_1: Rswbtn.1 SWBTN.2 | length 23.2
  Top Layer w0.6: Rswbtn.1 12.358,-32.424 15.748,-35.814 SWBTN.2@15.748,-48.514
PKAMPFB: Cpk.1 Dpk.2 J10.8 Jpk.1 Rpk1.1 Rpk2.2 | length 62
  Top Layer w0.6: Jpk.1 Dpk.2 -12.7,2.794 -4.318,-5.588 Rpk2.2 ; Cpk.1 Rpk1.1
  Bottom Layer w0.6: J10.8 -11.938,-13.97 -10.414,-12.446 -10.414,8.278 Dpk.2
PKAMPIN: Cdc1.1 Cdc3.1 J9.1 J9.7 J10.11 Jsamp.1 pad.16 pad.17 pad.18 | length 65.8
  Top Layer w0.6: Jsamp.1 -24.638,-12.192 -24.638,-9.144 -22.606,-7.112 -20.028,-7.112 Cdc3.1 -19.266,-6.35 J10.11 -14.478,-6.35 -13.804,-5.676 Cdc1.1 -13.554,-3.052 -13.554,-2.221 -13.085,-1.752 -10.948,-1.752 pad.18 ; pad.16 7.62,-14.478 9.652,-16.51 J9.7
  Bottom Layer w0.6: pad.18 -7.874,-4.826 -7.874,-9.906 -1.232,-16.548 0.139,-16.548 0.431,-16.256 pad.17 2.54,-16.256 4.318,-14.478 pad.16
PKAMPOUT: Dpk.1 J10.10 | length 12
  Bottom Layer w0.6: J10.10 -14.224,-8.89 -12.7,-7.366 Dpk.1
PKDRAIN: J9.12 Rpk1.2 | length 5.1
  Top Layer w0.6: Rpk1.2 14.859,-5.588 J9.12
PTS1: Cdc8_U_PT_Sensor1.1 Jpt_U_PT_Sensor1.1 pad.4@-9.398,-30.988 pad.5@-14.224,-59.182 PT_U_PT_Sensor1.1 PTbuf_U_PT_Buffer1.3 PTr1_U_PT_Sensor1.1 | length 59.9
  Top Layer w0.6: pad.5@-14.224,-59.182 -13.97,-59.436 -5.721,-59.436 -4.643,-58.359 -3.627,-58.359 PTbuf_U_PT_Buffer1.3 ; pad.4@-9.398,-30.988 Jpt_U_PT_Sensor1.1 PT_U_PT_Sensor1.1 5.246,-30.988 PTr1_U_PT_Sensor1.1 6.008,-33.528 Cdc8_U_PT_Sensor1.1
  Bottom Layer w0.6: pad.5@-14.224,-59.182 -14.224,-54.864 -9.398,-50.038 pad.4@-9.398,-30.988
PTS2: Cdc8_U_PT_Sensor2.1 Jpt_U_PT_Sensor2.1 PT_U_PT_Sensor2.1 PTbuf_U_PT_Buffer2.3 PTr1_U_PT_Sensor2.1 | length 59.5
  Top Layer w0.6: Cdc8_U_PT_Sensor2.1 -31.496,6.18 -30.818,6.858 Jpt_U_PT_Sensor2.1 ; PT_U_PT_Sensor2.1 -25.4,5.291 -25.146,5.545 PTr1_U_PT_Sensor2.1 -25.2,6.77 -25.2,6.858 Jpt_U_PT_Sensor2.1 ; PTbuf_U_PT_Buffer2.3 -16.637,36.195 -28.194,24.638 Jpt_U_PT_Sensor2.1
PTS3: Cdc8_U_PT_Sensor3.1 Jpt_U_PT_Sensor3.1 PT_U_PT_Sensor3.1 PTbuf_U_PT_Buffer3.3 PTr1_U_PT_Sensor3.1 | length 25.1
  Top Layer w0.6: PTbuf_U_PT_Buffer3.3 5.461,53.467 8.89,56.896 PT_U_PT_Sensor3.1 20.408,56.896 Cdc8_U_PT_Sensor3.1 PTr1_U_PT_Sensor3.1 26.836,56.73 Jpt_U_PT_Sensor3.1
PTS4: Cdc8_U_PT_Sensor4.1 Jpt_U_PT_Sensor4.1 pad.4@29.21,-48.006 pad.4@29.21,-54.864 PT_U_PT_Sensor4.1 PTbuf_U_PT_Buffer1.5 PTr1_U_PT_Sensor4.1 | length 106.8
  Top Layer w0.6: PTbuf_U_PT_Buffer1.5 3.909,-59.563 4.558,-60.212 16.242,-60.212 21.59,-54.864 pad.4@29.21,-54.864 ; pad.4@29.21,-48.006 29.21,-27.919 27.156,-25.865 27.156,-20.342 32.004,-15.494 32.004,-12.7 27.716,-8.412 27.716,-6.467 26.837,-5.588 24.892,-5.588 23.622,-4.318 23.622,2.286 25.146,3.81 PT_U_PT_Sensor4.1 25.146,4.318 PTr1_U_PT_Sensor4.1 28.106,7.024 28.946,6.184 Cdc8_U_PT_Sensor4.1
  Bottom Layer w0.6: pad.4@29.21,-54.864 pad.4@29.21,-48.006
PTS5: Cdc8_U_PT_Sensor5.1 Jpt_U_PT_Sensor5.1 PT_U_PT_Sensor5.1 PTbuf_U_PT_Buffer2.5 PTr1_U_PT_Sensor5.1 | length 57.2
  Top Layer w0.6: Jpt_U_PT_Sensor5.1 -6.35,1.27 -5.08,0 PT_U_PT_Sensor5.1 -3.556,2.012 -3.644,2.1 Cdc8_U_PT_Sensor5.1 -3.644,5.676 -4.572,6.604 PTr1_U_PT_Sensor5.1 -6.008,9.056 -9.144,12.192 -9.144,14.478 -10.922,16.256 -10.922,29.464 -8.382,32.004 2.286,32.004 3.562,33.28 PTbuf_U_PT_Buffer2.5
PTS6: Cdc8_U_PT_Sensor6.1 Jpt_U_PT_Sensor6.1 PT_U_PT_Sensor6.1 PTbuf_U_PT_Buffer3.5 PTr1_U_PT_Sensor6.1 | length 53.6
  Top Layer w0.6: Jpt_U_PT_Sensor6.1 -10.668,55.372 -12.192,56.896 PT_U_PT_Sensor6.1 -18.962,56.896 Cdc8_U_PT_Sensor6.1 -22.948,56.984 -24.384,58.42 -24.384,60.706 -23.368,61.722 -9.277,61.722 PTbuf_U_PT_Buffer3.5
Q1A: J10.9 J14.1
Q1B: J10.23 J14.2
Q2A: J10.4 J15.1
Q2B: J10.5 J15.2
RESET: J10.3 J13.2 Rrst.2 | length 2.8
  Top Layer w0.6: J10.3 Rrst.2
RX1: J9.19 RF.1 | length 3.7
  Top Layer w0.6: RF.1 J9.19
RX2: BT1.1 J9.21
SAMPIN: Cdc2.1 Csc.2 Dms1.1 Dms2.2 J9.4 Rls.2 | length 93
  Top Layer w0.6: Rls.2 -4.318,-14.478 -2.716,-12.876 11.518,-12.876 Cdc2.1
  Bottom Layer w0.6: Dms1.1 -3.452,-34.902 -2.816,-35.538 -2.816,-40.258 1.016,-44.09 27.686,-44.09 28.956,-42.82 Dms2.2 28.888,-24.466 19.49,-24.466 19.154,-24.13 J9.4
SAR0: BUF.6 BUF.7 Cdc7.1 J9.6 | length 17.3
  Top Layer w0.6: Cdc7.1 8.089,-20.447 BUF.6 BUF.7 4.648,-19.107 16.637,-19.107 J9.6
SAR3: Csc.1 J9.8 J10.19 | length 3.8
  Top Layer w0.6: Csc.1 14.312,-13.97 J9.8
SOA1: CDC2_U_PT_Buffer1.1 J9.23 JPTbufA_U_PT_Buffer1.1 pad.24 PTbuf_U_PT_Buffer1.1 PTbuf_U_PT_Buffer1.2 | length 203.4
  Top Layer w0.6: JPTbufA_U_PT_Buffer1.1 -5.374,-55.88 -5.462,-55.792 ; CDC2_U_PT_Buffer1.1 -5.462,-55.792 ; pad.24 -3.556,-55.118 -3.556,-55.725 PTbuf_U_PT_Buffer1.1@-3.584,-55.753 ; PTbuf_U_PT_Buffer1.2 -3.584,-57.023 PTbuf_U_PT_Buffer1.1@-3.584,-55.753 ; -5.462,-55.792 -4.647,-55.792 -4.608,-55.753 PTbuf_U_PT_Buffer1.1@-3.584,-55.753
  Bottom Layer w0.6: pad.24 -6.35,-53.34 -6.35,-60.452 20.65,-60.452 24.676,-56.426 34.506,-56.426 42.164,-48.768 42.164,40.132 40.132,42.164 24.638,42.164 18.288,35.814 18.288,25.781 J9.23
SOA2: CDC2_U_PT_Buffer2.1 J9.24 JPTbufA_U_PT_Buffer2.1 pad.21 pad.22 pad.23 PTbuf_U_PT_Buffer2.1 PTbuf_U_PT_Buffer2.2 | length 40.2
  Top Layer w0.6: JPTbufA_U_PT_Buffer2.1 -5.588,39.458 CDC2_U_PT_Buffer2.1 -2.673,39.37 PTbuf_U_PT_Buffer2.1@-2.286,38.983 ; pad.23 PTbuf_U_PT_Buffer2.1@-2.286,38.983 ; PTbuf_U_PT_Buffer2.2 PTbuf_U_PT_Buffer2.1 PTbuf_U_PT_Buffer2.1@-2.286,38.983 ; pad.21 13.716,28.194 15.24,26.67 J9.24
  Bottom Layer w0.6: pad.23 3.556,41.148 5.08,39.624 9.652,39.624 pad.22 10.922,35.306 13.716,32.512 pad.21
SOA3: CDC2_U_PT_Buffer3.1 J10.17 JPTbufA_U_PT_Buffer3.1 pad.29 pad.35 PTbuf_U_PT_Buffer3.1 PTbuf_U_PT_Buffer3.2 | length 14.6
  Top Layer w0.6: pad.29 -17.145,8.382 J10.17 ; pad.35 3.308,48.52 PTbuf_U_PT_Buffer3.1 ; PTbuf_U_PT_Buffer3.2 PTbuf_U_PT_Buffer3.1 ; CDC2_U_PT_Buffer3.1 6.692,49.022 JPTbufA_U_PT_Buffer3.1 5.213,49.022 PTbuf_U_PT_Buffer3.1
SOB1: CDC3_U_PT_Buffer1.1 J10.16 JPTbufB_U_PT_Buffer1.1 pad.36 PTbuf_U_PT_Buffer1.6 PTbuf_U_PT_Buffer1.7 | length 127
  Top Layer w0.6: PTbuf_U_PT_Buffer1.6 2.029,-58.293 2.029,-57.023 PTbuf_U_PT_Buffer1.7 4.298,-57.023 4.337,-57.062 CDC3_U_PT_Buffer1.1 ; pad.36 8.382,-55.626 7.786,-55.626 CDC3_U_PT_Buffer1.1 ; JPTbufB_U_PT_Buffer1.1 8.209,-57.15 8.121,-57.062 CDC3_U_PT_Buffer1.1
  Bottom Layer w0.6: J10.16 -21.59,1.397 -21.59,-6.858 -24.13,-9.398 -24.13,-57.912 -20.828,-61.214 -10.16,-61.214 -7.874,-58.928 -7.874,-51.562 -5.842,-49.53 0.762,-49.53 5.588,-54.356 9.144,-54.356 pad.36
SOB2: CDC3_U_PT_Buffer2.1 J10.25 JPTbufB_U_PT_Buffer2.1 pad.25 pad.37 PTbuf_U_PT_Buffer2.6 PTbuf_U_PT_Buffer2.7 | length 15.8
  Top Layer w0.6: J10.25 pad.25 ; PTbuf_U_PT_Buffer2.7 3.553,37.465 3.553,36.195 PTbuf_U_PT_Buffer2.6 5.458,36.195 5.585,36.068 CDC3_U_PT_Buffer2.1@7.262,36.068 ; pad.37 7.112,35.902 CDC3_U_PT_Buffer2.1 CDC3_U_PT_Buffer2.1@7.262,36.068 ; JPTbufB_U_PT_Buffer2.1 7.262,41.656 CDC3_U_PT_Buffer2.1@7.262,36.068
SOB3: CDC3_U_PT_Buffer3.1 J10.24 JPTbufB_U_PT_Buffer3.1 pad.26 pad.38 PTbuf_U_PT_Buffer3.6 PTbuf_U_PT_Buffer3.7 | length 13.3
  Top Layer w0.6: J10.24 pad.26 ; pad.38 -5.489,51.308 ; JPTbufB_U_PT_Buffer3.1 -5.489,49.022 -5.489,51.308 ; CDC3_U_PT_Buffer3.1 CDC3_U_PT_Buffer3.1@-5.489,53.594 ; PTbuf_U_PT_Buffer3.7 -2.314,52.197 PTbuf_U_PT_Buffer3.6@-2.314,53.467 ; PTbuf_U_PT_Buffer3.6 PTbuf_U_PT_Buffer3.6@-2.314,53.467 ; -5.489,51.308 CDC3_U_PT_Buffer3.1@-5.489,53.594 ; CDC3_U_PT_Buffer3.1@-5.489,53.594 -4.067,53.594 -3.94,53.467 PTbuf_U_PT_Buffer3.6@-2.314,53.467
SWBTN: J9.3 Rswbtn.2 | length 2.6
  Top Layer w0.6: Rswbtn.2 J9.3
SWDIP0: J9.16 SWDIP.8 | length 21.2
  Top Layer w0.6: SWDIP.8 6.223,16.764 J9.16
SWDIP1: J9.15 SWDIP.7 | length 25.2
  Top Layer w0.6: SWDIP.7 -2.794,15.494 -1.778,14.478 5.588,14.478 9.144,10.922 J9.15@16.256,3.81
SWDIP2: J9.14 SWDIP.6 | length 30
  Top Layer w0.6: SWDIP.6 -5.334,13.97 -4.572,13.208 4.064,13.208 6.604,10.668 16.002,1.27 J9.14
SWDIP3: J9.13 SWDIP.5 | length 34.4
  Top Layer w0.6: SWDIP.5 -7.874,12.7 -1.524,6.35 7.366,6.35 14.986,-1.27 J9.13
TX: BT1.2 J9.22
VBAT: J11.2 Rbufb1.2 | length 3.2
  Top Layer w0.6: J11.2 Rbufb1.2
VCC1: J2.5 J2.6 J2.7 J21.1 | length 22.3
  Bottom Layer w0.6: J21.1 20.802,5.562 29.525,5.562 29.805,5.842 J2.5 J2.6 J2.7
VCC2: J21.2 SWspw.1 | length 14.2
  Top Layer w0.6: J21.2 21.463,1.905 21.844,2.286 21.844,13.462 SWspw.1
VCC3: J21.3
VCC4: J20.1 pad.6@-0.508,-14.986 pad.6@-17.526,39.116 pad.6@-20.066,27.686 pad.6@-20.066,35.306 Rref1.2 | length 117.3
  Top Layer w0.6: Rref1.2 -19.978,16.09 J20.1 ; pad.6@-20.066,35.306 -20.066,36.576 pad.6@-17.526,39.116 ; pad.6@-0.508,-14.986 3.302,-14.986 4.578,-16.262 4.578,-17.907
  Bottom Layer w0.6: pad.6@-20.066,35.306 -20.066,27.686 -24.638,23.114 -24.638,20.574 -22.606,18.542 -21.082,18.542 -19.939,17.399 J20.1 ; pad.6@-17.526,39.116 -16.002,39.116 -10.584,33.698 -10.584,16.426 -4.826,10.668 -4.826,9.398 -1.778,6.35 3.556,6.35 7.112,2.794 7.112,-1.27 5.334,-3.048 -1.27,-3.048 -4.064,-5.842 -4.064,-11.43 pad.6@-0.508,-14.986
VCC5: J1.5 J1.6 J1.7 J20.2
VCC6: J20.3 SLED.1 | length 30.8
  Bottom Layer w0.6: SLED.1 -27.94,14.478 -24.511,11.049 J20.3
VCC_BUF_U_PT_Buffer1: BUF.8 Dbufb1.2 Dms1.2 pad.3@27.686,9.906 pad.3@-8.128,1.016 pad.19 pad.20 PTbuf_U_PT_Buffer1.8 PTbuf_U_PT_Buffer2.8 PTbuf_U_PT_Buffer3.8 PTr1_U_PT_Sensor1.2 PTr1_U_PT_Sensor2.2 PTr1_U_PT_Sensor3.2 PTr1_U_PT_Sensor4.2 PTr1_U_PT_Sensor5.2 PTr1_U_PT_Sensor6.2 RLED?.2 SWspw.2 | length 566.3
  Top Layer w0.6: PTr1_U_PT_Sensor2.2 -25.146,9.906 -26.67,11.43 -26.67,24.427 -16.553,34.544 -14.192,34.544 -12.616,32.968 -12.616,26.502 -12.022,25.908 -12.022,15.8 -10.557,14.335 -10.557,3.423 -8.15,1.016 -8.15,6.162 PTr1_U_PT_Sensor5.2 ; PTr1_U_PT_Sensor6.2 -22.098,59.944 -21.42,60.622 -11.092,60.622 -8.89,58.42 -8.89,47.752 -7.366,46.228 -4.318,46.228 -3.556,46.99 -3.556,49.663 PTbuf_U_PT_Buffer3.8 -2.292,48.52 -0.254,46.482 20.32,46.482 23.368,49.53 PTr1_U_PT_Sensor3.2 25.234,55.03 28.702,51.562 28.702,40.386 ; Dms1.2 -6.858,-49.022 -2.198,-53.682 RLED?.2 ; PTbuf_U_PT_Buffer1.8 2.032,-55.747 RLED?.2 ; PTbuf_U_PT_Buffer2.8 3.562,42.424 5.588,44.45 24.638,44.45 28.702,40.386 ; PTr1_U_PT_Sensor1.2 7.708,-39.282 9.978,-41.552 Dbufb1.2 ; pad.19 11.43,30.734 11.43,31.242 14.478,34.29 pad.20 ; pad.3@27.686,9.906 26.504,8.724 PTr1_U_PT_Sensor4.2 24.892,8.978 SWspw.2 24.892,19.05 24.13,19.812 24.13,31.496 28.702,36.068 ; RLED?.2 2.198,-53.848 7.366,-53.848 8.128,-53.086 8.128,-43.584 Dbufb1.2 ; Dbufb1.2 11.684,-43.076 11.684,-49.53 12.738,-50.584 35.268,-50.584 40.132,-45.72 40.132,38.354 37.592,40.894 33.528,40.894 28.702,36.068 ; 28.702,36.068 28.702,40.386
  Bottom Layer w0.6: pad.3@-8.128,1.016 -9.144,2.032 -9.144,13.208 -11.684,15.748 -11.684,31.496 -14.478,34.29 -16.51,34.29 -27.686,45.466 -27.686,46.482 -25.146,49.022 -20.574,49.022 -2.286,30.734 pad.19 ; pad.20 27.686,34.29 29.464,32.512 29.464,22.606 31.242,20.828 31.242,13.462 pad.3@27.686,9.906
VREF: BUF.1 BUF.2 CDC.1 J10.6 J10.7 Jbufa.1 Sms.2 | length 29.9
  Top Layer w0.6: J10.6 Sms.2 -1.149,-19.05 BUF.2 BUF.1 -1.911,-17.018 Jbufa.1 ; J10.7 -14.478,-14.351 -14.478,-12.192 -12.568,-10.282 CDC.1
pads on no net: J3.1 J4.1 J7.1 J7.2 J7.3 J7.4 J7.5 J8.1 J8.2 J8.3 J8.4 J8.5 J9.9 J9.17 J9.18 J9.20 J9.25 J9.26 J10.1 J10.2 J10.26 J12.1 J12.2 J16.1 J16.2 J16.3 J16.4 J16.5 J16.6 J17.1 J17.2 J17.3 J17.4 J17.5 J17.6 J18.1 J19.1 J22.2 J23.2 Sms.3

## Polygon pours and split planes (outlines as drawn)
AGND on Top Layer "Top Layer-No Net" (solid, pour order 7): -43.942,63.5 43.942,63.5 43.942,-63.5 -43.942,-63.5 -43.942,63.5
DGND on Bottom Layer "Top Layer-No Net" (solid, pour order 24): -43.942,63.5 43.942,63.5 43.942,-63.5 -43.942,-63.5 -43.942,63.5

## Keep-outs
Keep-Out Layer:
  lines w0.254: -43.942,-63.5 43.942,-63.5 43.942,63.5 -43.942,63.5 -43.942,-63.5

## Silkscreen, mask and mechanical layers (free items; w line width, h text height)
Top Overlay:
  text "Front" at -5.794,53.678 h2.54
  text "Put your design here" at -23.368,41.148 h2.54
  text "-" at -34.29,36.322 h1.52
  text "+" at -34.163,33.909 h1.52
  text "M-" at 32.893,33.147 h1.02
  text "GND" at -14.986,31.242 h1.02
  text "VDIO" at 11.557,30.988 h1.02
  text "ChA" at 32.131,30.48 h1.02
  text "Vbat" at -34.544,30.353 h1.02
  text "3.0" at -14.986,28.702 h1.02
  text "GND" at 11.684,28.194 h1.02
  text "GND" at 32.004,27.94 h1.02
  text "Ibat" at -34.925,26.797 h1.02
  text "+5V" at 32.004,26.289 h1.02
  text "3.1" at -14.986,26.162 h1.02
  text "1.7" at 11.811,26.162 h1.02
  text "3.2" at -14.986,23.622 h1.02
  text "1.6" at 11.811,23.622 h1.02
  text "ChB" at 32.131,22.098 h1.02
  text "D1" at -34.798,21.717 h1.02
  text "1.5" at 11.811,21.209 h1.02
  text "3.3" at -14.986,21.082 h1.02
  text "M+" at 33.02,20.447 h1.02
  text "IN2" at -34.925,19.177 h1.02
  text "3.4" at -14.986,18.542 h1.02
  text "1.4" at 11.811,18.542 h1.02
  text "IN1" at -34.925,16.637 h1.02
  text "3.5" at -14.986,16.002 h1.02
  text "1.3" at 11.811,16.002 h1.02
  text "SLW" at -35.052,14.351 h1.02
  text "1.2" at 11.811,13.589 h1.02
  text "3.6" at -14.986,13.462 h1.02
  text "INV" at -34.925,11.811 h1.02
  text "3.7" at -14.986,10.922 h1.02
  text "1.1" at 11.811,10.922 h1.02
  text "D2" at 32.893,10.541 h1.02
  text "EN" at -34.798,9.398 h1.02
  text "15.0" at -15.113,8.382 h1.02
  text "1.0" at 11.811,8.382 h1.02
  text "EN" at 32.766,7.874 h1.02
  text "D2" at -34.798,6.604 h1.02
  text "15.1" at -14.986,5.842 h1.02
  text "12.0" at 11.811,5.842 h1.02
  text "INV" at 32.258,5.588 h1.02
  text "12.1" at 11.811,3.429 h1.02
  text "15.2" at -15.113,3.302 h1.02
  text "SLW" at 32.258,2.667 h1.02
  text "15.3" at -15.113,0.762 h1.02
  text "12.2" at 11.811,0.635 h1.02
  text "IN1" at 32.639,0.381 h1.02
  text "15.4" at -15.113,-1.778 h1.02
  text "12.3" at 11.811,-1.778 h1.02
  text "IN2" at 32.258,-2.286 h1.02
  text "M+" at -34.671,-3.302 h1.02
  text "15.5" at -15.113,-4.318 h1.02
  text "12.4" at 11.811,-4.318 h1.02
  text "D1" at 33.147,-5.334 h1.02
  text "ChB" at -34.798,-5.842 h1.02
  text "0.0" at -14.986,-6.858 h1.02
  text "12.5" at 11.811,-6.858 h1.02
  text "+5V" at -34.798,-8.255 h1.02
  text "0.1" at -14.986,-9.398 h1.02
  text "12.6" at 11.811,-9.398 h1.02
  text "GND" at -34.671,-10.922 h1.02
  text "0.2" at -14.986,-11.938 h1.02
  text "12.7" at 11.811,-11.938 h1.02
  text "ChA" at -34.671,-13.462 h1.02
  text "0.3" at -14.986,-14.478 h1.02
  text "2.7" at 11.811,-14.478 h1.02
  text "M-" at -34.671,-15.875 h1.02
  text "0.4" at -14.986,-17.018 h1.02
  text "2.6" at 11.811,-17.018 h1.02
  text "0.5" at -14.986,-19.558 h1.02
  text "2.5" at 11.811,-19.558 h1.02
  text "0.6" at -14.986,-22.098 h1.02
  text "2.4" at 11.811,-22.225 h1.02
  text "0.7" at -14.986,-24.638 h1.02
  text "2.3" at 11.811,-24.638 h1.02
  text "RST" at -14.986,-27.178 h1.02
  text "2.2" at 11.811,-27.178 h1.02
  text "GND" at -14.986,-28.829 h1.02
  text "2.1" at 11.811,-29.718 h1.02
  text "2.0" at 11.811,-32.258 h1.02
  text "-" at 33.528,-32.512 h1.52 r180
  text "VDD" at -14.986,-33.147 h1.02
  text "+" at 33.782,-35.941 h1.52 r90
  text "Don't delete any LED & hole" at -32.258,-41.148 h2.54